# Altium PCB L5 2024.1.26.PcbDoc
Units mm, origin at the board's own origin, x right, y up, seen from the top; angles counter-clockwise.
Board outline 26.75 x 8.25 mm, 4 copper layers (Top Layer, MidLayer1, MidLayer2, Bottom Layer); 55 components, 34 nets, 152 pads, 33 vias.
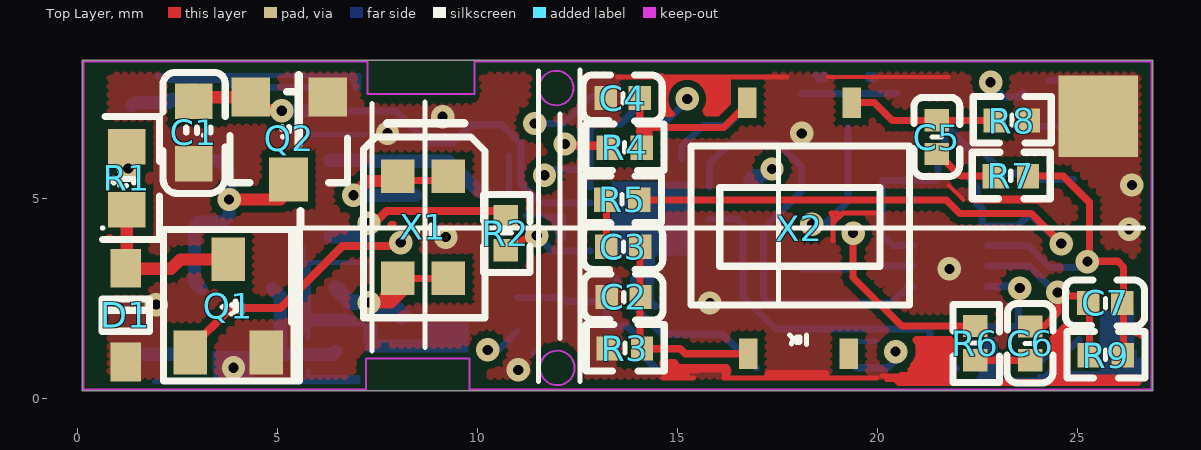
[diagram p0: Top Layer view]
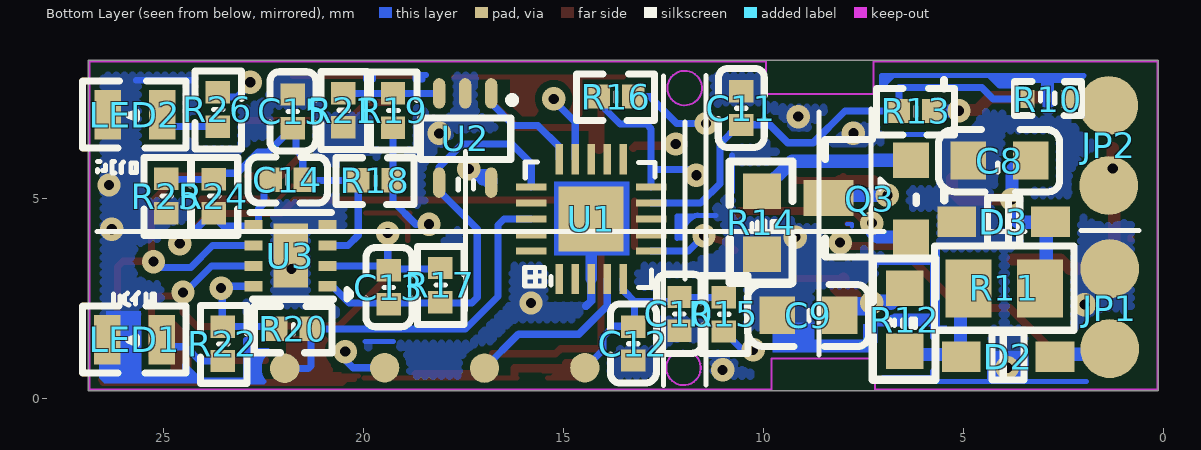
[diagram p1: Bottom Layer view, seen from below]
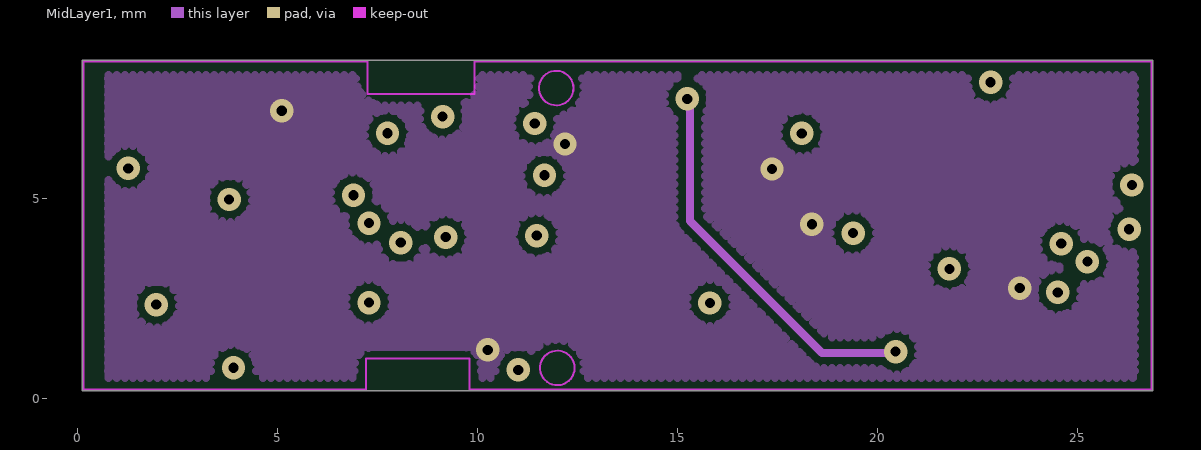
[diagram p2: MidLayer1]
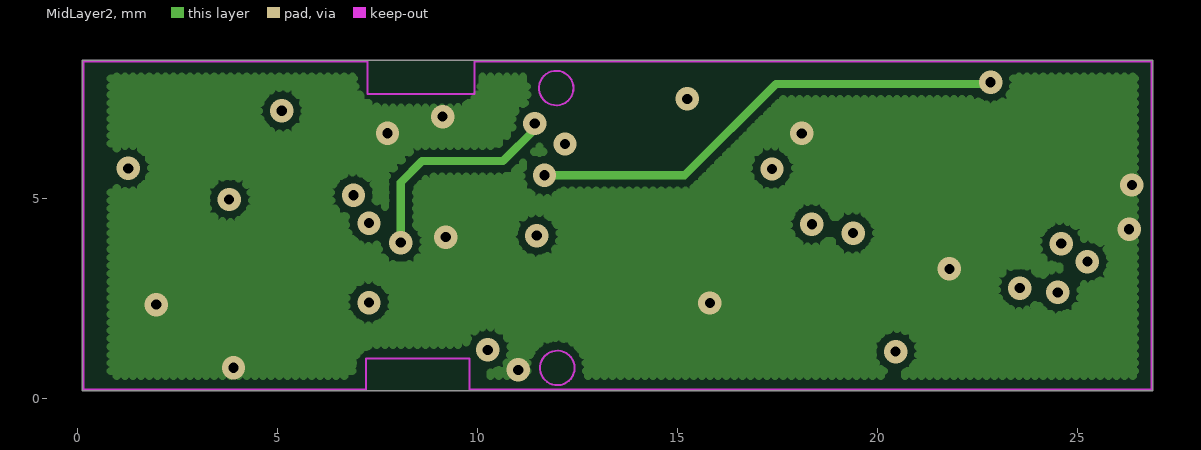
[diagram p3: MidLayer2]

## Layer stack, top to bottom
Top Layer: signal copper 0.0356
Dielectric: core 0.32, FR-4, Dk 4.8
MidLayer1: signal copper 0.0356
Dielectric: prepreg 0.32, FR-4, Dk 4.8
MidLayer2: signal copper 0.0356
Dielectric: core 0.32, FR-4, Dk 4.8
Bottom Layer: signal copper 0.0356

## Board outline
0.124,0.208 26.876,0.208 26.876,8.461 0.124,8.461

## Design rules (kind name [scope] priority, off if disabled: settings)
Clearance Clearance_1 [InNet('AA')] p1: gap=0.127
Clearance Clearance_2 [InNet('BB')] p2: gap=0.127
Clearance [All] p3: gap=0.102
ComponentClearance [All] p1 off: gap=0.254 collisioncheckmode=3 verticalgap=0.254 showdistances=FALSE
HoleSize [All] p1 off: absolutevalues=TRUE maxlimit=25.4 minlimit=0.025 maxpercent=80.000 minpercent=20.000
LayerPairs [All] p1 off: enforce=TRUE
PlaneClearance [All] p1: clearance=0.254
PlaneConnect [All] p1: planeconnectstyle=Direct reliefexpansion=0.508 reliefentries=4 reliefconductorwidth=0.254 reliefairgap=0.254
PolygonConnect PolygonConnect_1 [All] p1: connectstyle=Direct reliefconductorwidth=0.508 reliefentries=4 polygonreliefangle="90 Angle" airgapwidth=0.254
PolygonConnect [All] p2 off: connectstyle=Direct reliefconductorwidth=0.508 reliefentries=4 polygonreliefangle="90 Angle" airgapwidth=0.254
RoutingLayers [All] p1: top layer_v5=FALSE mid layer 1_v5=FALSE mid layer 2_v5=FALSE bottom layer_v5=FALSE
RoutingVias [All] p1: holewidth=0.711 width=1.27 viastyle="Through Hole" minholewidth=0.254 minwidth=0.508 maxholewidth=25.4 maxwidth=25.4
SilkscreenOverComponentPads [All] p1: minsilkscreentomaskgap=0.254
SolderMaskExpansion [All] p1: expansion=0.051
Width [All] p1: maxlimit=254 minlimit=0.102 preferedwidth=0.254
21 further rules are at their usual default settings.

## Components (designator, comment, footprint, x,y, rotation, side; value= is the part's Value field where it differs from the comment)
C1 "10uF" 0603C 2.911,7.442 r0 top
C2 "NC" 0402C 13.231,2.548 r90 top
C3 "470pF" 0402C 13.221,3.805 r90 top
C4 "100nF" 0402C 13.211,7.521 r90 top
C5 "470pF" 0402C 21.481,6.97 r0 top
C6 "100nF" 0402C 23.815,1.811 r0 top
C7 "3.3pF" 0402C 25.27,2.398 r90 top
C8 "220nF" 0603C 3.32,5.959 r270 bottom
C9 "10uF" 0603C 8.092,2.09 r270 bottom
C10 "220nF" 0402C 12.098,2.548 r180 bottom
C11 "100nF" 0402C 10.554,7.694 r180 bottom
C12 "1uF" 0402C 13.251,1.806 r180 bottom
C13 "2.2pF" 0402C 19.365,3.213 r180 bottom
C14 "2.2pF" 0402C 21.471,5.474 r270 bottom
C15 "100nF" 0402C 21.765,7.61 r180 bottom
D1 "ESD08V32D-LC" SOD323 1.204,0.922 r0 top
D2 "1SS355" SOD323 2.71,1.059 r90 bottom
D3 "ESD08V32D-LC" SOD323 2.822,4.43 r90 bottom
JP1 "NC" "SMD2 - duplicate" 1.311,3.255 r180 bottom
JP2 "NC" "SMD2 - duplicate" 1.336,7.336 r180 bottom
LED1 "绿光" SMD2 25.047,1.478 r180 bottom
LED2 "红光" SMD2 25.042,7.102 r180 bottom
Q1 "BC817-40,215" SOT23-3 2.817,1.158 r0 top
Q2 "丝印7150C" SOT23#1 6.292,7.546 r0 top
Q3 "2SD1782KT146R" SOT23#2 6.309,4.006 r270 bottom
R1 "FSMD010-0603-R" 0603R 1.234,6.304 r0 top
R2 "2K" 0402 10.711,4.572 r270 top
R3 "420K" 0402 13.256,1.26 r0 top
R4 "10K" 0402 13.254,6.276 r0 top
R5 "10K" 0402 13.19,4.976 r0 top
R6 "1K" 0402 22.449,1.821 r270 top
R7 "10K" 0402 22.906,5.568 r0 top
R8 "420K" 0402 22.931,6.96 r0 top
R9 "2M" 0402 25.276,1.09 r0 top
R10 "1SS400GT2R" "0402 -R" 2.388,7.496 r180 bottom
R11 "47R" 0805 3.025,2.753 r180 bottom
R12 "15R" 0603R 6.462,1.196 r0 bottom
R13 "10K" 0402 5.756,7.198 r0 bottom
R14 "27R" 0603R 10.036,3.619 r0 bottom
R15 "1R" 0402 10.988,2.543 r270 bottom
R16 "3K" 0402 13.256,7.559 r0 bottom
R17 "10K" 0402 18.082,3.272 r270 bottom
R18 "10K" 0402 19.271,5.464 r0 bottom
R19 "4.99K" 0402 19.258,7.638 r270 bottom
R20 "10K" 0402 21.316,1.753 r0 bottom
R21 "4.99K" 0402 20.5,7.643 r270 bottom
R22 "22K" 0402 23.513,1.803 r270 bottom
R24 "1M" 0402 23.739,5.494 r270 bottom
R25 "10K" 0402 24.925,5.499 r270 bottom
R26 "3K" 0402 23.645,7.663 r270 bottom
U1 "N76E003AQ20" QFP20 15.104,2.997 r180 bottom
U2 "丝印 8743" SOT23-5 16.785,7.638 r180 bottom
U3 "GS8552-FR" SOP8 20.899,2.817 r180 bottom
X1 "红光" SMD4 8.004,5.563 r0 top
X2 "KDS1001AF2" SMD4A 16.744,7.409 r0 top

## Footprints (in the part's own frame and the unit in brackets; to place one, negate y for a bottom-side part, rotate by r counter-clockwise, add the part's x,y. Pads: shape width x height; smd on the part's side, far side on the other; paste and mask are expansions set on the pad)
0402 [mil]
  rect 22x24 smd: 1(0,0) 2(33.7,0)
  silkscreen extent -21,-22 56,24
"0402 -R" [mil]
  rect 14x18 smd: 1(0.4,0) 2(-39.8,0)
  silkscreen extent -52,-16 14,17
0402C [mil]
  rect 24x22 smd: 1(0,0) 2(0,-33.3)
  silkscreen extent -23,-56 23,22
0603C [mil]
  rect 37x35 smd: 1(0,0) 2(0,-61.4)
  silkscreen extent -30,-91 31,28
0603R [mil]
  rect 37x35 smd: 1(0,0) 2(0,-61.9)
  silkscreen extent -24,-92 32,30
0805 [mil]
  rect 45x57 smd: 1(-2.4,0.4) 2(-72.8,0.4)
  silkscreen extent -106,-41 31,42
QFP20 [mil]
  rect 7x30 smd: 1(0,0) 2(15.75,0) 3(31.5,0) 4(47.24,0) 5(62.99,0) 11(62.99,117.99) 12(47.24,117.99) 13(31.5,117.99) 14(15.75,117.99) 15(0,117.99)
  rect 30x7 smd: 6(90.49,27.5) 7(90.49,43.25) 8(90.49,59) 9(90.49,74.74) 10(90.49,90.49) 16(-27.5,90.49) 17(-27.5,74.74) 18(-27.5,59) 19(-27.5,43.25) 20(-27.5,27.5)
  rect 64x64 smd: 21(31.5,59)
  silkscreen extent -33,-9 94,115
SMD2 [mil]
  rect 26x49 smd: 1(0.4,0) 2(-53.3,0)
  silkscreen extent -78,-33 24,33
"SMD2 - duplicate" [mil]
  round 58 smd: 1(-1.2,0) 2(-1.2,-78.74)
SMD4 [mil]
  rect 33x33 smd: 1(0,0) 2(50,0) 3(50,-100.4) 4(0,-100.4)
  silkscreen extent -34,-139 86,39
SMD4A [mil]
  rect 18x30 smd: 1(0,0) 1(0,0) 2(103,0) 3(100,-247.3) 4(0.9,-247.3)
  silkscreen extent -55,-199 160,-43
SOD323 [mil]
  rect 30x38 smd: 1(0,0) 2(0,92.3)
  silkscreen extent -23,30 24,62
SOP8 [mil]
  rect 18x10 smd: 1(0,0) 2(0,20) 3(0,40) 4(0,60) 5(-72.7,60) 6(-72.7,40) 7(-72.7,20) 8(-72.7,0)
  rect 34x63 smd: 9(-36.2,30)
  silkscreen extent -76,-13 22,73
SOT23#1 [mil]
  rect 38x38 smd: 1(-1.5,0) 2(-77.2,0)
  rect 38x43 smd: 3(-40,-81.1)
  silkscreen extent -98,-84 18,5
SOT23#2 [mil]
  rect 35x35 smd: 1(-1.5,0) 2(-77.2,0)
  rect 35x49 smd: 3(-40,-81.1)
  silkscreen extent -98,-84 18,5
SOT23-3 [mil]
  rect 33x43 smd: 1(0,0) 2(75,0) 3(37.5,91.7)
  silkscreen extent -26,-28 108,121
SOT23-5 [mil]
  oval 12x30 smd: 1(-0.8,0) 2(-26.39,0) 3(-51.98,0) 4(-51.98,-87.9) 5(-0.8,-87.9)
  silkscreen extent -70,-65 23,-4

## Part data
C1 C2 C3 C4 C5 C6 C7 C8 C9 C10 C11 C12 C13 C14 C15: library part CAP, "Capacitor"
D1 D3: library part BV05C
D2 R10: library part DIO, "Diode"
JP1 JP2: library part CON2, "Connector"
LED1 LED2: library part LED
Q1 Q3: library part NPN-BEC, "NPN Transistor"
Q2: library part P-GSD.
R1: library part FUSE, "Fuse"
R2 R3 R4 R5 R6 R7 R8 R9 R11 R12 R13 R14 R15 R16 R17 R18 R19 R20 R21 R22 R24 R25 R26: library part RAS
U1: library part N76E003AQ20.
U2: library part 5
U3: library part LM358.
X1: library part LED.
X2: library part PHOTO., "Photosensitive Diode"

## Free pads (board coordinates)
  round 0.737 smd far side: ""(14.463,0.78) ""(16.972,0.77) ""(19.469,0.78) ""(21.968,0.765)
  rect 1.981x2.032 smd: ""(25.517,7.066)

## Via types
v1: diameter 0.584, hole 0.254, Top Layer to Bottom Layer, tented both sides, 33 vias

## Nets (pads, with @x,y where several pads share a name; then routed paths per layer and width w, separated by ;. In a path a pad name is that pad's centre, name@x,y a point inside that pad or via, vN(x,y) a via of type N, cw(c..) or ccw(c..) an arc to the next point about the centre after c; other vN are vias at no path point)
GND: C1.2 C2.1 C4.1 C8.2 C9.2 C10.2 C11.1 C12.2 C15.1 D1.1 D3.2 JP1.1 LED1.2 LED2.2 pad.@25.517,7.066 Q1.2 Q2.1 R3.1 R8.2 R14.1 R21.2 R25.2 U1.3 U1.21 U2.2 U3.4 U3.9 | length 100.1
  Top Layer w0.102: 18.75,8.044 21.778,8.044 ; 21.783,5.339 22.146,4.976
  Top Layer w0.104: 26.469,0.516 26.535,0.516 ; 26.497,0.394 26.581,0.478
  Top Layer w0.127: 13.498,8.044 17.742,8.044 ; 14.633,0.526 15.395,0.526 ; 14.696,0.704 15.512,0.704 ; 14.717,0.526 15.288,0.526 15.199,0.615 ; 14.862,7.125 cw(c15.243,7.501) 15.688,7.204 ; 16.157,0.526 19.987,0.526 ; 18.89,3.955 18.89,4.33 18.89,4.592 18.834,4.648 18.999,4.648 ; 18.908,4.415 18.908,4.42 19.136,4.648 19.942,4.648 ; 20.119,0.577 20.884,0.577 ; 20.221,0.483 20.571,0.483 ; 20.465,0.526 21.148,0.526 ; 24.529,0.541 26.454,0.541 ; 24.676,0.546 24.676,1.6 ; 24.762,0.572 24.762,1.687
  Top Layer w0.152: 14.602,7.203 14.74,7.203 ; 14.602,7.287 14.74,7.287 ; 14.602,7.78 14.75,7.78 ; 14.602,7.869 14.78,7.869 ; 14.602,7.971 14.902,7.971 ; 14.602,8.077 14.602,7.125 14.862,7.125 ; 15.585,7.986 15.814,7.986 ; 15.687,7.887 15.814,7.887 ; 15.814,7.165 15.814,7.976
  Top Layer w0.178: 20.475,0.478 20.538,0.414 26.507,0.414
  Top Layer w0.203: 14.643,0.704 15.004,0.704 ; 14.643,0.892 14.93,0.892 14.93,0.765 16.22,0.765 16.22,0.615 ; 15.745,7.165 15.997,7.165 16.231,7.399 16.231,7.991 ; 17.28,0.615 18.697,0.615 ; 20.846,0.531 21.692,0.531 ; 20.856,0.721 21.808,0.721 ; 20.91,0.829 ccw(c20.557,1.182) 21.057,1.182 21.057,1.295 ccw(c20.805,1.295) 20.983,1.473 21.808,1.473 ; 21.026,0.805 21.217,0.805 ; 21.1,0.922 21.407,0.922 21.725,0.922 ; 21.217,0.721 21.217,1.336 ; 22.433,4.981 24.036,4.981 ; 24.402,0.561 24.402,1.504 24.762,1.864 24.762,1.687 24.676,1.6 ; 24.513,0.557 24.513,1.615
  Bottom Layer w0.127: 1.923,0.439 7.013,0.439 ; 4.018,7.887 3.818,7.887 ; 4.044,7.96 4.234,7.96 4.308,8.035 ; 4.082,7.96 4.107,7.96 ; 4.13,8.087 4.239,8.087 ; 4.158,7.96 3.744,7.96 ; 4.234,8.087 4.107,8.087 ; 4.361,8.087 4.097,7.823 3.818,7.823 3.818,7.887 ; 5.585,6.614 7.201,6.614 ; 5.654,1.737 5.654,3.767 ; 5.768,3.409 7.264,3.409 ; 5.776,0.693 5.776,0.531 7.013,0.531 ; 5.776,1.532 5.776,3.409 ; 5.776,1.869 7.144,1.869 ; 5.776,1.971 6.904,1.971 ; 5.776,2.065 6.721,2.065 6.939,2.007 ; 6.899,8.004 7.041,8.004 ; 11.187,4.58 11.712,4.58 ; 11.385,1.128 11.387,1.128 11.513,1.253 ; 11.643,4.6 11.77,4.536 11.854,4.473 11.951,4.361 11.986,4.272 12.004,4.018 12.162,4.013 12.162,4.567 11.712,4.58 ; 11.986,4.404 12.083,4.039 12.083,4.458 11.712,4.58 ; 19.248,1.43 19.957,1.43 ; 22.38,1.214 22.451,1.143 cw(c22.082,0.775) 22.603,0.775 22.603,0.729 cw(c22.187,0.729) 22.482,0.434 ; 22.423,1.214 22.718,1.214 22.718,1.483 22.951,1.483 22.951,0.498 ; 22.502,0.419 22.86,0.419 ccw(c22.86,0.436) 22.873,0.424 ; 22.555,1.146 22.936,1.146 ; 22.591,0.536 22.629,0.536 ; 22.619,1.044 22.649,1.044 ; 22.639,1.097 22.682,1.097 22.682,0.531 ; 24.046,0.483 24.046,0.556 24.173,0.556 24.465,0.848 24.465,0.635 24.47,0.63 26.482,0.63 ; 24.242,0.566 26.421,0.566 ; 24.247,0.584 24.298,0.584 24.407,0.693 ; 25.852,0.452 26.459,0.452 26.551,0.544 26.551,0.98 LED1.2@26.546,0.98 ; 26.482,0.643 LED1.2@26.482,0.869 ; 3.744,7.96 2.113,7.96 1.986,8.087 6.754,8.087 ; 3.744,7.96 3.818,7.887 ; 4.107,8.087 4.252,8.087 4.107,8.087 ; 6.754,8.087 6.944,7.897 6.944,7.76 7.041,7.76 7.041,8.087 6.754,8.087
  Bottom Layer w0.152: 7.257,1.273 9.192,1.273 9.395,1.476 ; 10.785,5.169 10.785,6.081 ; 22.781,0.457 25.796,0.457 26.177,0.838 ; 24.28,7.965 25.682,7.965
  Bottom Layer w0.203: U1.3@14.304,3.091 14.304,2.447 14.432,2.319
  Bottom Layer w0.279: U1.3 U1.21@14.304,3.974
  other v1: 11.019,0.726 3.901,0.78 1.971,2.357 15.809,2.398 21.798,3.251 9.205,4.044 26.292,4.239 26.36,5.347 7.75,6.642 18.105,6.637 9.129,7.056
NetC2_2: C2.2 C3.2 R3.2 X2.4 | length 5.3
  Top Layer w0.178: C3.2@14.061,3.8 14.061,1.311 14.117,1.255 15.067,1.255 15.194,1.128 X2.4
NetC3_1: C3.1 R5.1 | length 1.1
  Top Layer w0.178: C3.1 R5.1@13.221,4.945
NetC4_2: C4.2 R4.2 X2.1 | length 4.6
  Top Layer w0.178: R4.2@14.056,6.281 C4.2 ; 14.107,6.789 16.159,6.789 16.744,7.374 X2.1@16.744,7.409
  Top Layer w0.305: R4.2 14.221,6.388 14.221,6.655
NetC5_1: C5.1 R8.1 X2.2 | length 3.8
  Top Layer w0.178: X2.2 19.921,7.409 20.371,6.96 R8.1
NetC5_2: C5.2 R7.1 | length 1.6
  Top Layer w0.178: C5.2@21.519,6.124 22.075,5.568 R7.1
NetC6_1: C6.1 C7.1 R9.1 U3.7 | length 5.6
  Top Layer w0.178: C6.1 24.163,1.811 24.508,2.156 v1(24.508,2.662) 24.597,2.573 25.095,2.573 25.296,2.372 R9.1@25.296,1.087
  Bottom Layer w0.178: U3.7 23.795,3.325 24.458,2.662 v1(24.508,2.662)
NetC6_2: C6.2 R6.2 | length 1.5
  Top Layer w0.178: R6.2 C6.2@23.942,0.965
NetC7_2: C7.2 R7.2 R9.2 U3.6 | length 9.2
  Top Layer w0.178: R7.2 24.646,5.568 25.296,4.917 25.296,3.48 25.334,3.442 26.01,3.442 26.152,3.299 R9.2@26.152,1.087
  Bottom Layer w0.178: U3.6 23.769,3.833 24.315,3.287 25.103,3.287 v1(25.248,3.432)
NetC8_1: C8.1 D3.1 Q2.3 R11.1 | length 6.2
  Top Layer w0.305: v1(3.79,4.986) 5.067,4.986 5.283,5.202 Q2.3@5.283,5.509
  Bottom Layer w0.33: R11.1 2.929,2.921 2.929,4.323 3.02,4.415 3.635,4.415 3.785,4.564 3.785,5.723 3.548,5.959 C8.1
NetC9_1: C9.1 R12.2 X1.3 X1.4 | length 5.1
  Top Layer w0.178: X1.4 X1.3
  Top Layer w0.305: v1(7.287,2.408) 7.831,2.408 X1.4@8.199,2.776 ; 7.701,2.408 7.701,2.588 8.004,2.891 X1.4
  Bottom Layer w0.381: R12.2 6.815,2.416 v1@7.371,2.416
  Bottom Layer w0.457: v1(7.287,2.408) 7.381,2.314 7.869,2.314 C9.1
NetC10_1: C10.1 C12.1 pad.@14.463,0.78 R15.1 U1.5 | length 5.4
  Bottom Layer w0.178: R15.1@10.996,2.535 12.111,2.535 12.215,2.431 13.221,2.431 ; U1.5 13.504,2.714 13.221,2.431 ; pad.@14.453,0.78 14.013,1.219 14.013,1.549 13.746,1.816 13.241,1.816 13.221,1.836 13.221,2.431
NetC11_2: C11.2 R10.2 R13.2 U1.9 | length 12
  Bottom Layer w0.178: R10.2 4.252,7.496 4.536,7.78 6.612,7.78 R13.2 7.958,7.198 8.753,6.403 9.393,6.403 9.842,6.853 10.61,6.853 11.087,6.375 11.087,5.38 11.571,4.896 U1.9
NetC13_1: C13.1 R6.1 R17.1 U3.2 | length 8.4
  Top Layer w0.178: v1(19.39,4.145) 19.39,3.038 20.607,1.821 R6.1
  Bottom Layer w0.178: R17.1 18.108,3.246 19.398,3.246 19.477,3.325 U3.2 ; C13.1@19.39,3.254 v1(19.39,4.145)
NetC13_2: C13.2 R17.2 U1.16 U2.4 U3.1 | length 11
  Bottom Layer w0.178: U1.16 15.802,5.886 16.289,6.373 17.529,6.373 18.105,5.796 18.105,5.199 17.153,4.247 17.153,2.535 17.29,2.398 20.353,2.398 20.772,2.817 U3.1
NetC14_1: C14.1 C15.2 R18.2 R24.1 R25.1 U3.3 | length 8.7
  Bottom Layer w0.178: U3.3 20.386,3.833 20.127,4.092 R18.2 21.46,5.464 21.516,5.519 21.516,6.055 21.684,6.223 21.684,6.683 C15.2 21.786,6.764 22.377,6.172 22.629,6.172 23.16,5.641 23.592,5.641 23.749,5.484 R25.1@24.91,5.484
NetC14_2: C14.2 R5.2 R24.2 U3.5 | length 14.5
  Top Layer w0.178: R5.2 21.72,4.976 22.057,4.638 23.846,4.638 v1@24.592,3.891
  Bottom Layer w0.178: C14.2 22.482,5.309 22.482,4.889 22.619,4.752 U3.5@22.619,4.351 ; U3.5@22.766,4.321 23.508,4.321 23.792,4.605 23.792,4.638 24.549,3.881 v1(24.592,3.881)
NetD1_2: D1.2 Q1.3 R1.2 | length 4.2
  Top Layer w0.305: R1.2@1.229,4.763 1.229,3.261 1.219,3.251 2.339,3.251 2.576,3.487 Q1.3
NetD2_1: D2.1 JP1.2 | length 1.5
  Bottom Layer w0.33: JP1.2 1.478,1.118 2.652,1.118 D2.1
NetD2_2: D2.2 R11.2 R12.1 | length 3.1
  Bottom Layer w0.33: R11.2 5.07,2.568 5.07,1.151 5.108,1.113 6.378,1.113 R12.1
NetJP2_1: JP2.1 R10.1 | length 1.1
  Bottom Layer w0.33: JP2.1 1.44,7.409 2.291,7.409 R10.1
NetJP2_2: JP2.2 R1.1 | length 0.5
  Top Layer w0.305: v1(1.267,5.763) R1.1@1.267,6.271
NetLED1_1: LED1.1 R22.2 | length 1.7
  Bottom Layer w0.178: R22.2 24.082,0.947 24.437,1.303 24.862,1.303 LED1.1
NetLED2_1: LED2.1 R26.2 | length 1.5
  Bottom Layer w0.178: R26.2 24.737,6.807 LED2.1
NetQ1_1: Q1.1 R16.1 | length 14.1
  Top Layer w0.203: Q1.1 2.817,1.252 3.84,2.276 5.077,2.276 6.624,3.823 7.998,3.823 v1(8.082,3.907)
  MidLayer2 w0.203: v1(8.082,3.907) 8.082,5.41 8.616,5.944 10.638,5.944 11.433,6.739 v1(11.433,6.886)
  Bottom Layer w0.178: v1(11.433,6.886) 12.167,6.886 12.84,7.559 R16.1
NetQ3_1: Q3.1 R2.1 | length 4.8
  Top Layer w0.203: v1(7.287,4.394) 7.422,4.394 7.722,4.694 10.589,4.694 R2.1
  Bottom Layer w0.33: Q3.1 7.15,4.044 7.287,4.181 v1(7.287,4.394)
NetQ3_2: Q3.2 R14.2 | length 4
  Bottom Layer w0.33: Q3.2 7.318,5.966 7.346,5.939 9.284,5.939 R14.2@10.036,5.187
NetQ3_3: Q3.3 X1.1 X1.2 | length 4.2
  Top Layer w0.178: X1.1 8.103,5.464 9.174,5.464 X1.2
  Top Layer w0.305: v1(6.901,5.093) 7.259,5.451 X1.1@8.09,5.451
  Bottom Layer w0.33: v1(6.901,5.093) Q3.3@8.448,5.093
NetR2_2: R2.2 U1.6 | length 2.4
  Top Layer w0.178: R2.2 10.945,3.919 v1(11.483,4.082)
  Bottom Layer w0.178: v1(11.483,4.082) 11.869,3.696 U1.6
NetR16_2: R16.2 R26.1 U1.10 | length 17.5
  MidLayer2 w0.203: v1(11.674,5.591) 15.179,5.591 17.465,7.877 22.789,7.877 v1(22.83,7.917)
  Bottom Layer w0.178: v1(11.674,5.591) 11.821,5.738 12.805,5.738 ; U1.10 12.805,6.75 12.926,6.871 13.581,6.871 14.112,7.402 R16.2 ; v1(22.83,7.917) 22.83,7.869 23.147,7.551 23.533,7.551 R26.1
NetR19_1: R19.1 R21.1 U2.3 | length 2.4
  Bottom Layer w0.178: U2.3 R21.1@20.495,7.638
NetR20_1: pad.@21.968,0.765 R20.1 U1.18 | length 9.3
  Bottom Layer w0.178: U1.18 16.485,4.496 16.634,4.346 16.634,2.56 17.447,1.748 21.311,1.748 21.311,0.826 21.372,0.765 pad.@21.968,0.765
NetU1_15: U1.15 U2.1 | length 2.7
  Bottom Layer w0.178: U1.15 15.104,6.303 15.639,6.838 16.246,6.838 16.805,7.397 U2.1
VCC: C1.1 Q2.2 R4.1 R13.1 R15.2 R18.1 R19.2 R20.2 R22.1 U2.5 U3.8 | length 12.1
  Top Layer w0.203: v1(12.189,6.373) 12.233,6.33 13.2,6.33 R4.1
  Top Layer w0.305: C1.1 3.01,7.541 4.326,7.541 4.648,7.219 v1@5.093,7.219
  Bottom Layer w0.178: v1(10.257,1.224) 10.526,1.224 R15.2 ; v1(18.359,4.366) 18.692,4.366 19.258,4.933 R19.2 ; R20.2 22.225,1.806 23.515,1.806 23.528,1.819 23.528,2.797 23.508,2.817 U3.8
  Bottom Layer w0.305: U2.5@16.802,5.484 16.919,5.601 17.216,5.601 v1(17.363,5.748) ; U2.5 16.863,5.405 16.947,5.489 17.023,5.489
  Bottom Layer w0.33: v1@5.113,7.198 R13.1
  other v1: 23.556,2.769 5.108,7.203
pads on no net: U1.1 U1.2 U1.4 U1.7 U1.8 U1.11 U1.12 U1.13 U1.14 U1.17 U1.19 U1.20 X2.3
copper on no net: | length 20.3
  Top Layer w0.102: 0.775,3.97 0.841,3.97 0.841,4.059 0.775,4.059 0.775,3.97 ; 0.775,5.436 0.775,5.598 0.775,5.514 0.853,5.436 0.775,5.436
  Top Layer w0.127: 7.798,4.336 7.841,4.379 7.91,4.379 ; 26.586,1.557 26.586,1.943 ; 26.446,1.621 26.553,1.621 26.553,1.857 26.446,1.857 26.446,1.621
  MidLayer1 w0.203: v1(15.243,7.501) 15.311,7.432 15.311,4.45 18.611,1.151 v1@20.424,1.151
  Bottom Layer w0.102: 7.783,4.313 7.783,4.369 7.912,4.369
  Bottom Layer w0.152: 18.438,8.095 18.692,8.095 18.692,7.981 18.519,7.981 18.519,8.095 ; 19.766,7.981 19.939,7.981 19.939,8.09 19.766,8.09 19.766,7.981
  Bottom Layer w0.178: 13.904,2.997 13.904,2.327 14.615,1.615 16.126,1.615 16.972,0.77 ; 14.704,5.994 14.704,6.924 15.243,7.463 v1(15.243,7.501) ; 19.469,0.78 20.259,0.78 20.455,0.975 v1(20.455,1.181)

## Polygon pours and split planes (outlines as drawn)
GND on Top Layer "Top Layer-GND" (hatched 90Degree grid 0.203 track 0.203, remove dead copper, pour order 2): 1.024,8.077 26.497,8.077 26.497,3.462 26.497,0.503 13.04,0.503 0.833,0.503 0.833,2.383 0.833,8.077 1.024,8.077
VCC on MidLayer1 "MidLayer1-VCC" (hatched 90Degree grid 0.203 track 0.203, remove dead copper, pour order 4): 1.468,8.098 26.434,8.098 26.434,7.706 26.434,0.511 23.884,0.511 0.77,0.511 0.77,3.642 0.77,8.098 1.468,8.098
GND on MidLayer2 "MidLayer2-GND" (hatched 90Degree grid 0.203 track 0.203, remove dead copper, pour order 6): 1.298,8.054 26.434,8.054 26.434,6.911 26.434,0.531 23.332,0.531 0.833,0.531 0.833,1.684 0.833,8.054 1.298,8.054
GND on Bottom Layer "Bottom Layer-GND" (hatched 90Degree grid 0.203 track 0.203, remove dead copper, pour order 8): 2.548,8.087 26.497,8.087 26.497,3.749 26.497,0.478 18.644,0.478 0.81,0.478 0.81,3.886 0.81,8.087 2.537,8.087

## Keep-outs
Keep-Out Layer:
  circle w0.051: c11.968,7.77 r0.432
  circle w0.051: c11.996,0.775 r0.432
  lines w0.051: 0.15,0.234 7.214,0.234 7.214,1.006 9.797,1.006 9.797,0.234 26.85,0.234 26.85,8.435 9.929,8.435 9.929,7.623 7.247,7.623 7.247,8.435 0.15,8.435 0.15,0.234

## Other copper
Top Layer:
  rectangle net GND: 21.173,0.965 21.808,1.473
  rectangle net GND: 15.814,7.24 16.072,7.986
  rectangle net GND: 15.814,7.341 16.173,7.986
  rectangle net GND: 15.824,7.897 16.231,8.077
  rectangle net GND: 14.643,0.526 15.248,0.704
  rectangle net GND: 20.549,0.531 20.952,0.668
  rectangle net GND: 21.76,0.498 21.93,1.488
  rectangle net GND: 21.651,0.584 21.819,0.673
Bottom Layer:
  rectangle net GND: 8.717,1.483 9.776,1.913
  rectangle net GND: 25.56,0.706 26.429,2.192
  rectangle net GND: 2.743,7.292 3.028,7.849
  rectangle net GND: 5.415,1.626 5.776,1.831
  rectangle net GND: 3.393,0.439 4.404,0.838
  rectangle net GND: 7.211,1.156 9.776,1.483
  rectangle net GND: 22.741,0.483 22.926,1.445
  rectangle net GND: 13.353,3.579 15.237,5.441
  rectangle net GND: 25.646,0.63 26.482,1.219
  rectangle net GND: 2.738,7.615 3.056,7.96
  rectangle net GND: 3.373,0.701 4.399,1.196
  rectangle net GND: 7.144,1.4 7.511,1.869
  rectangle net GND: 8.76,1.372 9.388,1.626
  rectangle net GND: 25.545,0.594 26.327,1.801

## Silkscreen, mask and mechanical layers (free items; w line width, h text height)
Top Overlay:
  circle w0.127: c3.155,6.589 r0.005
  circle w0.127: c5.136,6.553 r0.005
  circle w0.127: c1.054,5.349 r0.005
  circle w0.127: c1.214,5.326 r0.005
  circle w0.127: c0.627,4.272 r0.005
  lines w0.127: 3.609,2.294 3.691,2.339 3.691,2.144 ; 3.838,2.118 3.95,2.197 ; 5.659,4.277 26.645,4.277 ; 7.363,1.196 7.363,7.379 ; 8.494,4.145 8.494,4.234 8.532,4.272 9.192,4.272 ; 8.684,1.283 8.684,7.419 ; 8.834,4.112 8.834,4.351 ; 8.997,4.14 8.997,4.262 ; 11.521,0.434 11.521,8.194 ; 12.062,1.516 12.062,7.125 ; 12.558,0.434 12.558,8.222 ; 17.523,2.403 17.523,6.246 ; 17.803,1.6 17.897,1.488 17.846,1.377 ; 18.222,1.361 18.222,1.595 ; 17.973,1.405 17.973,1.547 18.057,1.547 18.062,1.552 18.062,1.42 18.047,1.405 17.973,1.405
  lines w0.152: 0.907,5.415 0.907,5.514 ; 1.133,5.499 1.415,5.499 1.415,5.415 ; 2.72,6.657 2.72,6.779 ; 2.987,6.647 2.987,6.784 ; 3.325,6.662 3.325,6.789 ; 3.858,2.344 4.102,2.344 4.102,2.149 ; 3.95,2.197 3.95,2.436 ; 5.108,6.754 5.108,6.802 ; 5.283,6.685 5.283,6.802
  lines w0.203: 5.532,6.363 5.532,8.098 ; 5.573,4.361 5.573,4.702 ; 7.744,6.891 9.67,6.891
Bottom Overlay:
  lines w0.127: 0.61,4.214 2.06,4.214 ; 3.457,4.181 4.397,4.181 ; 4.14,5.674 4.14,5.9 ; 6.525,1.806 6.525,1.976 ; 6.721,1.834 6.721,1.976 ; 6.848,1.826 6.721,1.908 6.861,1.991 ; 6.911,5.225 6.911,5.329 7.082,5.499 7.082,5.25 ; 6.982,4.181 26.655,4.181 ; 7.31,1.029 7.31,7.252 ; 8.611,1.092 8.611,7.165 ; 8.865,1.948 8.865,2.212 ; 9.959,4.181 9.959,4.448 ; 10.145,4.181 10.145,4.425 ; 10.29,4.181 10.29,4.389 ; 11.438,0.351 11.438,8.087 ; 11.956,2.997 11.956,6.924 ; 12.494,0.33 12.494,8.077 ; 15.479,3.071 15.682,3.071 ; 15.682,3.043 15.966,3.043 ; 15.702,2.827 15.702,3.287 ; 17.252,5.25 17.252,5.456 ; 17.447,2.212 17.447,6.182 ; 17.628,5.22 17.628,5.494 ; 25.281,2.482 25.281,2.626 25.217,2.626 25.217,2.416 25.347,2.416 25.433,2.329 25.433,2.621 ; 25.624,2.657 25.778,2.489 ; 25.692,2.367 25.692,2.522 ; 25.862,2.344 25.969,2.398 25.979,2.568 25.893,2.647 ; 25.994,5.923 26.053,5.865 26.053,5.662 ; 26.088,2.327 26.088,2.573 ; 26.213,5.649 26.286,5.649 26.286,5.933 26.228,5.933 ; 26.248,2.327 26.248,2.621 ; 26.449,5.845 26.449,5.705 26.525,5.705 ; 26.591,5.933 26.645,5.933 ; 26.65,5.674 26.65,5.728 ; 6.193,1.786 6.314,1.786 6.314,1.996 6.193,1.996 6.193,1.786 ; 9.655,4.181 9.787,4.181 9.787,4.44 9.655,4.44 9.655,4.181 ; 15.479,2.827 15.966,2.827 15.966,3.287 15.479,3.287 15.479,2.827 ; 25.672,5.664 25.809,5.664 25.809,5.9 25.725,5.9 25.672,5.9 25.672,5.664
  lines w0.203: 5.479,4.956 5.479,5.273 ; 5.484,7.762 5.484,7.976
Top Solder:
  circle w0.508: c11.996,0.775 r0.238
  circle w0.508: c11.968,7.77 r0.224